# Altium PCB DrumPad.PcbDoc
Units mm, origin at the board's own origin, x right, y up, seen from the top; angles counter-clockwise.
Board outline 152.4 x 101.6 mm, 2 copper layers (Top Layer, Bottom Layer); 127 components, 61 nets, 559 pads, 0 vias.
Unrouted connection lines stored in the file: 273.
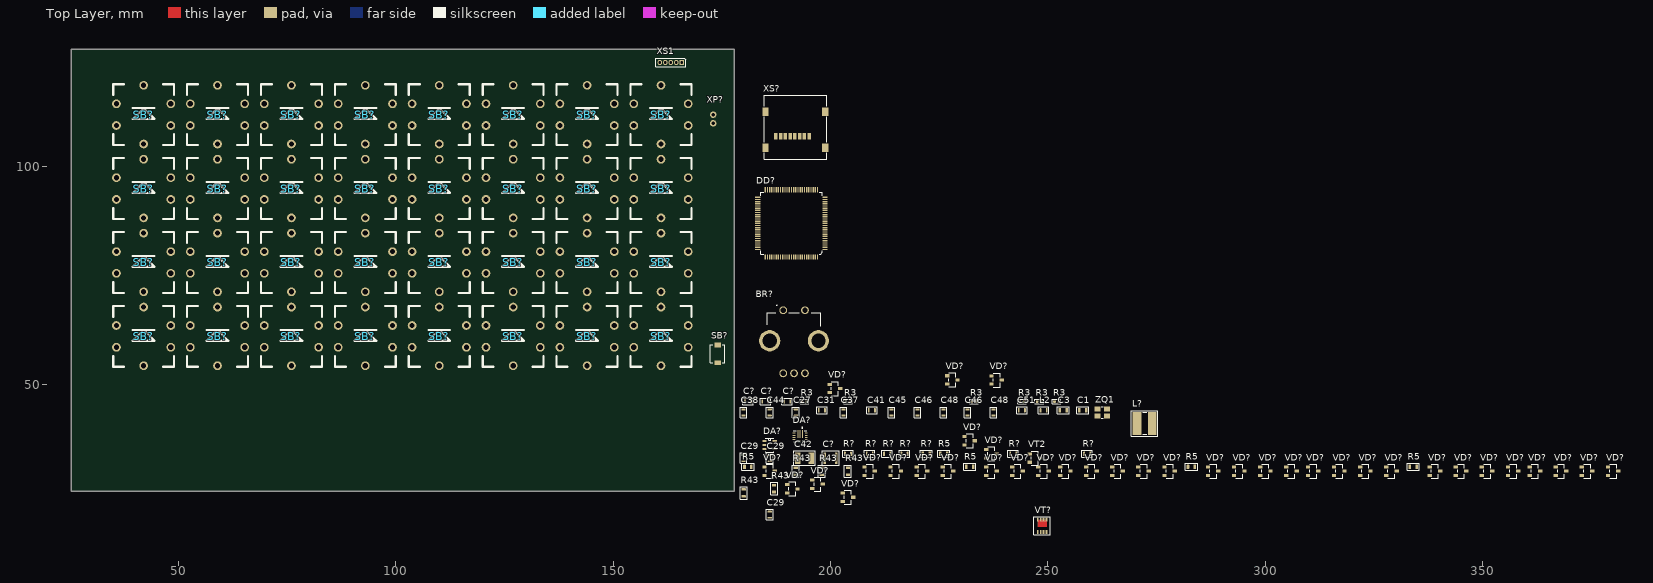
[diagram p0: Top Layer view]
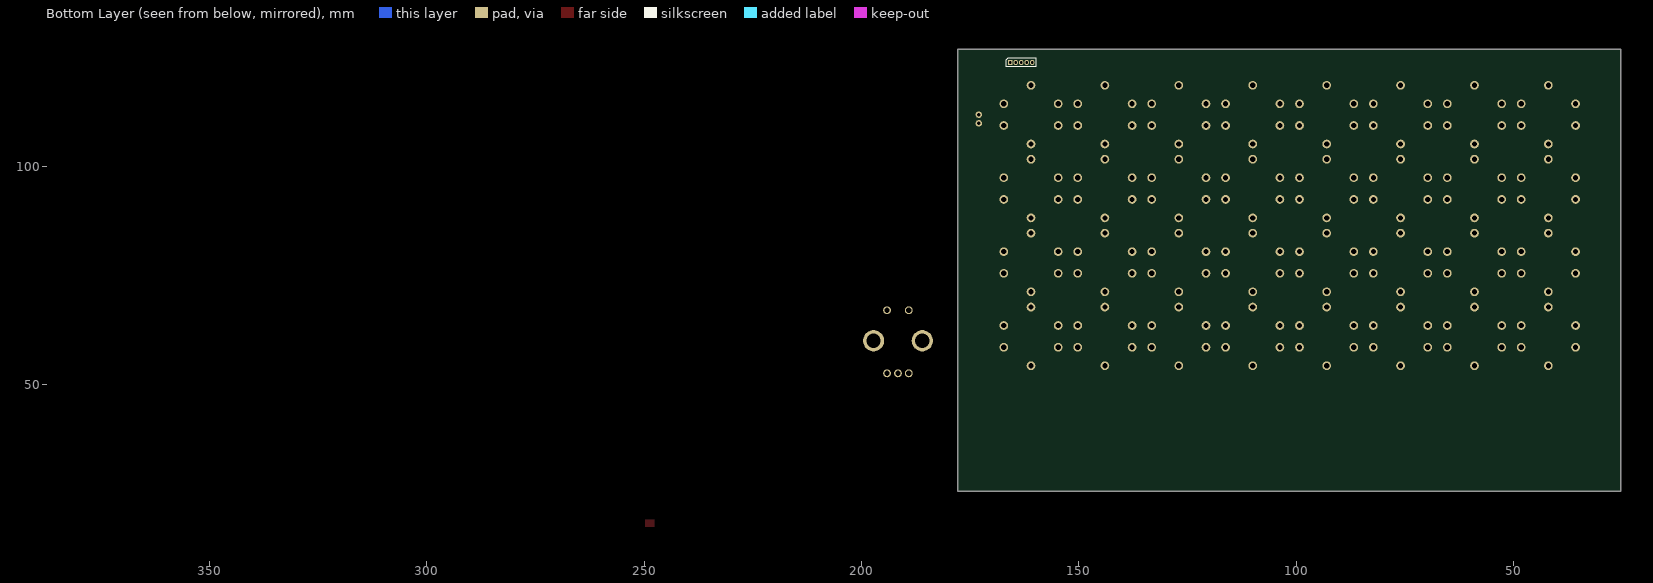
[diagram p1: Bottom Layer view, seen from below]

## Layer stack, top to bottom
Top Solder: solder mask 0.0102, Solder Resist, Dk 3.5
Top Layer: signal copper 0.0356
Dielectric 1: dielectric 0.32, FR-4, Dk 4.8
Bottom Layer: signal copper 0.0356
Bottom Solder: solder mask 0.0102, Solder Resist, Dk 3.5

## Board outline
25.4,25.4 177.8,25.4 177.8,127 25.4,127

## Design rules (kind name [scope] priority, off if disabled: settings)
Clearance [All] p1: gap=0.254 ignorepadtopadclearanceinfootprint=FALSE except(0: Arc-Hole Track-Hole SMDPad-Hole THPad-Hole Via-Hole Fill-Hole Poly-Hole Region-Hole Text-Hole)
PolygonConnect [All] p1: connectstyle=Relief reliefconductorwidth=0.254 reliefentries=4 polygonreliefangle="90 Angle" airgapwidth=0.254
RoutingVias [All] p1: holewidth=0.711 width=1.27 viastyle="Through Hole" minholewidth=0.711 minwidth=1.27 maxholewidth=0.711 maxwidth=1.27
SolderMaskExpansion [All] p1: expansion=0.102 istentingtop=FALSE
Width [All] p1: maxlimit=0.254 minlimit=0.254 preferedwidth=0.254
30 further rules are at their usual default settings.

## Classes and differential pairs
component class DrumPad: BR? C1 C3 C27 C29 C31 C37 C38 C41 C42 C44 C45 C46 C48 C51 C? DA? DD? L2 L? R3 R5 R43 R? SB? VD? VT2 VT? XP? XS1 XS? ZQ1

## Components (designator, comment, footprint, x,y, rotation, side; value= is the part's Value field where it differs from the comment)
BR? "PEC12R-4220F-S0024" PEC12R4220FS0024 189.1,67 r0 top
C1 "GRM1885C1H100JA01" C_0603_Manual_mount 257.999,44 r0 top value=10
C3 "GRM1885C1H100JA01" C_0603_Manual_mount 253.499,44 r0 top value=10
C27 "CC0603KRX7R9BB104" C_0603_Auto_mount 192,43.5 r90 top value="0,1 мк"
C29 "CC0603KRX7R9BB104" C_0603_Auto_mount 186,33 r90 top value="0,1 мк"
C29 "CC0603KRX7R9BB104" C_0603_Auto_mount 180,33 r90 top value="0,1 мк"
C29 "CC0603KRX7R9BB104" C_0603_Auto_mount 186,20 r90 top value="0,1 мк"
C31 "GRM188R61C105KA93" C_0603_Auto_mount 198,44 r0 top value="1,0 мк"
C37 "CC0603KRX7R9BB104" C_0603_Auto_mount 203,43.5 r90 top value="0,1 мк"
C38 "GRM188R61E225KA12" C_0603_Auto_mount 180,43.5 r90 top value="2,2 мк"
C41 "CC0603KRX7R9BB104" C_0603_Auto_mount 209.5,44 r0 top value="0,1 мк"
C42 "GRM32ER61H106MA12" C_1210_Manual_mount 194,33 r0 top value="10 мк"
C44 "GRM188R61E225KA12" C_0603_Auto_mount 186,43.5 r90 top value="2,2 мк"
C45 "CC0603KRX7R9BB104" C_0603_Auto_mount 214,43.5 r90 top value="0,1 мк"
C46 "CC0603KRX7R9BB104" C_0603_Auto_mount 220,43.5 r90 top value="0,1 мк"
C46 "CC0603KRX7R9BB104" C_0603_Auto_mount 231.5,43.5 r90 top value="0,1 мк"
C48 "CC0603KRX7R9BB104" C_0603_Auto_mount 237.5,43.5 r90 top value="0,1 мк"
C48 "CC0603KRX7R9BB104" C_0603_Auto_mount 226,43.5 r90 top value="0,1 мк"
C51 "CC0603KRX5R5BB475" C_0603_Auto_mount 244,44 r0 top value="4,7 мк"
C? "CC0603KRX7R8BB103" C_0603_Auto_mount 185,46 r0 top value="0,01 мк"
C? "CC0603KRX7R8BB103" C_0603_Auto_mount 181,46 r0 top value="0,01 мк"
C? "CC0603KRX7R8BB103" C_0603_Auto_mount 190,46 r0 top value="0,01 мк"
C? "CC1210KRX5R5BB476" C_1210_Auto_mount 200,33 r0 top value="47 мк"
DA? "TPS630250" VQFN-14 193,38 r270 top
DA? "MAX1555EZK" SOT-23-5 186,36 r0 top
DD? "STM32F407VET6" LQFP-100 191,87 r180 top
L2 "BLM18AG102SN1" FB_0603_Auto_mount 249,44 r0 top value="1000 Ом (100 МГц)"
L? "SPM4020T-1R0M-LR" SRR4028 272.25,41 r0 top value="1 мкГн"
R3 "RC0402JR-0710KL" R_0402_Manual_mount 233,46 r0 top value="10 к"
R3 "RC0402JR-0710KL" R_0402_Manual_mount 194,46 r0 top value="10 к"
R3 "RC0402JR-0710KL" R_0402_Manual_mount 204,46 r0 top value="10 к"
R3 "RC0402JR-0710KL" R_0402_Manual_mount 248,46 r0 top value="10 к"
R3 "RC0402JR-0710KL" R_0402_Manual_mount 252,46 r0 top value="10 к"
R3 "RC0402JR-0710KL" R_0402_Manual_mount 244,46 r0 top value="10 к"
R5 "RC0603JR-07330RL" R_0603_Manual_mount 334,31 r0 top value=330
R5 "RC0603JR-07330RL" R_0603_Manual_mount 181,31 r0 top value=330
R5 "RC0603JR-07330RL" R_0603_Manual_mount 283,31 r0 top value=330
R5 "RC0603JR-07330RL" R_0603_Manual_mount 232,31 r0 top value=330
R5 "RC0603JR-07330RL" R_0603_Manual_mount 226,34 r0 top value=330
R43 "RC0603FR-074K7L" R_0603_Manual_mount 192,30 r90 top value="4,7 к"
R43 "RC0603FR-074K7L" R_0603_Manual_mount 204,30 r90 top value="4,7 к"
R43 "RC0603FR-074K7L" R_0603_Manual_mount 180,25 r90 top value="4,7 к"
R43 "RC0603FR-074K7L" R_0603_Manual_mount 187,26 r90 top value="4,7 к"
R43 "RC0603FR-074K7L" R_0603_Manual_mount 198,30 r90 top value="4,7 к"
R? "RC0603FR-07180KL" R_0603_Auto_mount 213,34 r0 top value="180 к"
R? "RC0603JR-07560KL" R_0603_Auto_mount 242,34 r0 top value="560 к"
R? "RC0603JR-07100KL" R_0603_Auto_mount 259,34 r0 top value="100 к"
R? "RC0603JR-0710KL" R_0603_Manual_mount 222,34 r0 top value="10 к"
R? "RC0603JR-07100KL" R_0603_Auto_mount 209,34 r0 top value="100 к"
R? "RC0603JR-07100KL" R_0603_Auto_mount 204,34 r0 top value="100 к"
R? "RC0603JR-07100KL" R_0603_Auto_mount 217,34 r0 top value="100 к"
SB? "TL1015AF160QG" TL1015AF160QG 174,57 r90 top
SB? "Led_button" Led_button 76,112 r0 top
SB? "Led_button" Led_button 110,78 r0 top
SB? "Led_button" Led_button 161,78 r0 top
SB? "Led_button" Led_button 110,95 r0 top
SB? "Led_button" Led_button 42,95 r0 top
SB? "Led_button" Led_button 93,78 r0 top
SB? "Led_button" Led_button 76,61 r0 top
SB? "Led_button" Led_button 127,112 r0 top
SB? "Led_button" Led_button 76,78 r0 top
SB? "Led_button" Led_button 59,61 r0 top
SB? "Led_button" Led_button 127,78 r0 top
SB? "Led_button" Led_button 127,95 r0 top
SB? "Led_button" Led_button 144,78 r0 top
SB? "Led_button" Led_button 127,61 r0 top
SB? "Led_button" Led_button 59,95 r0 top
SB? "Led_button" Led_button 59,112 r0 top
SB? "Led_button" Led_button 59,78 r0 top
SB? "Led_button" Led_button 110,112 r0 top
SB? "Led_button" Led_button 161,95 r0 top
SB? "Led_button" Led_button 93,61 r0 top
SB? "Led_button" Led_button 42,112 r0 top
SB? "Led_button" Led_button 161,112 r0 top
SB? "Led_button" Led_button 144,95 r0 top
SB? "Led_button" Led_button 144,112 r0 top
SB? "Led_button" Led_button 93,112 r0 top
SB? "Led_button" Led_button 42,78 r0 top
SB? "Led_button" Led_button 76,95 r0 top
SB? "Led_button" Led_button 161,61 r0 top
SB? "Led_button" Led_button 93,95 r0 top
SB? "Led_button" Led_button 42,61 r0 top
SB? "Led_button" Led_button 144,61 r0 top
SB? "Led_button" Led_button 110,61 r0 top
VD? "BAT54" SOT-23 317,30 r0 top
VD? "BAT54" SOT-23 357,30 r0 top
VD? "BAT54" SOT-23 288,30 r0 top
VD? "BAT54" SOT-23 237,30 r0 top
VD? "BAT54" SOT-23 374,30 r0 top
VD? "BAT54" SOT-23 266,30 r0 top
VD? "BAT54" SOT-23 209,30 r0 top
VD? "BAT54" SOT-23 294,30 r0 top
VD? "BAT54" SOT-23 362,30 r0 top
VD? "BAT54" SOT-23 254,30 r0 top
VD? "BAT54" SOT-23 221,30 r0 top
VD? "BAT54" SOT-23 243,30 r0 top
VD? "BAT54" SOT-23 272,30 r0 top
VD? "BAT54" SOT-23 339,30 r0 top
VD? "BAT54" SOT-23 368,30 r0 top
VD? "BAT54" SOT-23 351,30 r0 top
VD? "BAT54" SOT-23 345,30 r0 top
VD? "BAT54" SOT-23 227,30 r0 top
VD? "BAT54" SOT-23 215,30 r0 top
VD? "BAT54" SOT-23 249,30 r0 top
VD? "BAT54" SOT-23 278,30 r0 top
VD? "BAT54" SOT-23 329,30 r0 top
VD? "BAT54" SOT-23 260,30 r0 top
VD? "BAT54" SOT-23 191.2,25.95 r0 top
VD? "BAT54" SOT-23 311,30 r0 top
VD? "BAT54" SOT-23 204,24 r0 top
VD? "BAT54" SOT-23 380,30 r0 top
VD? "BAT54" SOT-23 323,30 r0 top
VD? "BAT54" SOT-23 197,27 r0 top
VD? "BAT54" SOT-23 186,30 r0 top
VD? "BAT54" SOT-23 300,30 r0 top
VD? "BAT54" SOT-23 306,30 r0 top
VD? "BAT54" SOT-23 201,49 r0 top
VD? "BAT54" SOT-23 238.2,50.95 r0 top
VD? "BAT54" SOT-23 228,51 r0 top
VD? "BAT54" SOT-23 232,37 r0 top
VD? "BAT54" SOT-23 237,34 r0 top
VT2 "BC817-40" SOT-23 247,33 r0 top
VT? "Si7415DN" PowerPAK-1212-8 248.67,17.435 r90 top
XP? "B2B-PH-K-S" B2B-PH-K-S 173,111 r270 top
XS1 "PBS1.27-5" PBS1.27-5 163.27,124 r180 top
XS? "5009010801" "MOLEX 5009010801" 195.1,107 r180 top
ZQ1 "NX3225SA-16.000M-STD-CRS-2" NX3225SA 262.499,43.5 r0 top value="16 МГц"

## Footprints (in the part's own frame and the unit in brackets; to place one, negate y for a bottom-side part, rotate by r counter-clockwise, add the part's x,y. Pads: shape width x height; smd on the part's side, far side on the other; paste and mask are expansions set on the pad)
B2B-PH-K-S [mm] "PH connector"
  round 1.5 hole 0.8 unplated: 1(1,0) 2(-1,0)
  body extent -2.95,-1.7 2.95,2.8, height 6.2
C_0603_Auto_mount [mm] "SMD 0603"
  rrect35% 0.4x0.95 smd: 1(-0.7,0) 2(0.7,0)
  silkscreen extent -1.2,-0.77 1.2,0.77, body extent -0.8,-0.43 0.8,0.43, height 0.9
C_0603_Manual_mount [mm] "SMD 0603"
  rrect35% 0.6x1 smd: 1(-0.8,0) 2(0.8,0)
  silkscreen extent -1.4,-0.8 1.4,0.8, body extent -0.8,-0.43 0.8,0.43, height 0.9
C_1210_Auto_mount [mm] "SMD 1210"
  rrect20% 0.6x2.7 smd: 1(-1.35,0) 2(1.35,0)
  silkscreen extent -1.95,-1.65 1.95,1.65, body extent -1.55,-1.3 1.55,1.3, height 2.5
C_1210_Manual_mount [mm] "SMD 1210"
  rrect20% 1.2x2.7 smd: 1(-1.55,0) 2(1.55,0)
  silkscreen extent -2.45,-1.65 2.45,1.65, body extent -1.55,-1.3 1.55,1.3, height 2.5
FB_0603_Auto_mount [mm] "SMD 0603"
  rrect35% 0.4x0.95 smd: 1(-0.7,0) 2(0.7,0)
  silkscreen extent -1.2,-0.77 1.2,0.77, body extent -0.8,-0.43 0.8,0.43, height 0.9
Led_button [mm] "Кнопка с встроеным светодиодом"
  round 2 hole 1.2: 1(-6.25,-2.5) 1(6.25,-2.5) 2(-6.25,2.5) 2(6.25,2.5) 3(0,-6.75) 4(0,6.75)
  silkscreen extent -7,-7 7,7, body extent -6.66,-8 6.66,8, height 7.1
LQFP-100 [mm] "14 x 14 mm 100 pin low-profile quad flat package outline"
  oval 1.2x0.3 smd paste-0.025 mask+0.05: 1(-7.75,6)
  rect 1.2x0.3 smd paste-0.025 mask+0.05: 2(-7.75,5.5) 3(-7.75,5) 4(-7.75,4.5) 5(-7.75,4) 6(-7.75,3.5) 7(-7.75,3) 8(-7.75,2.5) 9(-7.75,2) 10(-7.75,1.5) 11(-7.75,1) 12(-7.75,0.5) 13(-7.75,0) 14(-7.75,-0.5) 15(-7.75,-1) 16(-7.75,-1.5) 17(-7.75,-2) 18(-7.75,-2.5) 19(-7.75,-3) 20(-7.75,-3.5) 21(-7.75,-4) 22(-7.75,-4.5) 23(-7.75,-5) 24(-7.75,-5.5) 25(-7.75,-6) 51(7.75,-6) 52(7.75,-5.5) 53(7.75,-5) 54(7.75,-4.5) 55(7.75,-4) 56(7.75,-3.5) 57(7.75,-3) 58(7.75,-2.5) 59(7.75,-2) 60(7.75,-1.5) 61(7.75,-1) 62(7.75,-0.5) 63(7.75,0) 64(7.75,0.5) 65(7.75,1) 66(7.75,1.5) 67(7.75,2) 68(7.75,2.5) 69(7.75,3) 70(7.75,3.5) 71(7.75,4) 72(7.75,4.5) 73(7.75,5) 74(7.75,5.5) 75(7.75,6)
  rect 0.3x1.2 smd paste-0.025 mask+0.05: 26(-6,-7.75) 27(-5.5,-7.75) 28(-5,-7.75) 29(-4.5,-7.75) 30(-4,-7.75) 31(-3.5,-7.75) 32(-3,-7.75) 33(-2.5,-7.75) 34(-2,-7.75) 35(-1.5,-7.75) 36(-1,-7.75) 37(-0.5,-7.75) 38(0,-7.75) 39(0.5,-7.75) 40(1,-7.75) 41(1.5,-7.75) 42(2,-7.75) 43(2.5,-7.75) 44(3,-7.75) 45(3.5,-7.75) 46(4,-7.75) 47(4.5,-7.75) 48(5,-7.75) 49(5.5,-7.75) 50(6,-7.75) 76(6,7.75) 77(5.5,7.75) 78(5,7.75) 79(4.5,7.75) 80(4,7.75) 81(3.5,7.75) 82(3,7.75) 83(2.5,7.75) 84(2,7.75) 85(1.5,7.75) 86(1,7.75) 87(0.5,7.75) 88(0,7.75) 89(-0.5,7.75) 90(-1,7.75) 91(-1.5,7.75) 92(-2,7.75) 93(-2.5,7.75) 94(-3,7.75) 95(-3.5,7.75) 96(-4,7.75) 97(-4.5,7.75) 98(-5,7.75) 99(-5.5,7.75) 100(-6,7.75)
  silkscreen extent -7.1,-7.1 7.1,7.1, body extent -8,-8 8,8, height 1.5
"MOLEX 5009010801" [mm] "Molex microSD connector"
  rect 1.45x2 smd: 0(-3.675,2.6) 0(-3.675,-5.7) 0(10.075,-5.7) 0(10.075,2.6)
  rect 0.8x1.5 smd: 1(0,0) 2(1.1,0) 3(2.2,0) 4(3.3,0) 5(4.4,0) 6(5.5,0) 7(6.6,0) 8(7.7,0)
  silkscreen extent -4,-9.45 10.4,5.25, body extent -4.1,-9.35 10.5,5.15, height 1.93
NX3225SA [mm]
  rrect20% 1.4x1.2 smd: 1(-1.1,-0.8) 2(1.1,-0.8) 3(1.1,0.8) 4(-1.1,0.8)
  silkscreen extent -0.2,-1.35 0.2,1.35, body extent -1.6,-1.25 1.61,1.26, height 0.55
PBS1.27-5 [mm] "1.27mm-step 5-pin connector"
  rect 1x1.2 hole 0.6: 1(-2.54,0)
  oval 1x1.2 hole 0.6: 2(-1.27,0) 3(0,0) 4(1.27,0) 5(2.54,0)
  silkscreen extent -3.45,-1 3.45,1, body extent -3.33,-0.9 3.34,0.9, height 4.4
PEC12R4220FS0024 [mm]
  round 1.8 hole 1.2: 1(0,0) 2(5,0) A1(0,-14.5) B1(5,-14.5) C1(2.5,-14.5)
  round 4.875 hole 3.25: MH1(8.1,-7) MH2(-3.1,-7)
  silkscreen extent -3.7,-3.65 8.7,1.2, body extent -4.5,-14.6 9.5,0.15, height 20
PowerPAK-1212-8 [mm]
  rect 0.99x0.405 smd: D(1.435,-0.99) D(1.435,-0.33) D(1.435,0.33) D(1.435,0.99) G(-1.435,-0.99) S(-1.435,-0.33) S(-1.435,0.33) S(-1.435,0.99)
  Top Layer region: -0.325,-1.118 1.4,-1.118 1.4,1.117 -0.325,1.117
  silkscreen extent -2.11,-1.9 2.12,1.9, body extent -1.63,-1.8 1.63,1.8, height 1.12
R_0402_Manual_mount [mm] "SMD 0402"
  rrect50% 0.6x0.6 smd: 1(-0.5,0) 2(0.5,0)
  silkscreen extent -1,-0.5 1,0.5, body extent -0.5,-0.25 0.5,0.25, height 0.35
R_0603_Auto_mount [mm] "SMD 0603"
  rrect35% 0.4x0.95 smd: 1(-0.7,0) 2(0.7,0)
  silkscreen extent -1.2,-0.77 1.2,0.77, body extent -0.8,-0.43 0.8,0.43, height 0.45
R_0603_Manual_mount [mm] "SMD 0603"
  rrect35% 0.6x1 smd: 1(-0.8,0) 2(0.8,0)
  silkscreen extent -1.4,-0.8 1.4,0.8, body extent -0.8,-0.43 0.8,0.43, height 0.45
SOT-23 [mm] "SOT-23"
  rect 1x0.7 smd paste-0.05: 1(-1.2,0.95) 2(-1.2,-0.95) 3(1.2,0)
  silkscreen extent -0.8,-1.6 0.8,1.6, body extent -1.25,-1.5 1.25,1.5, height 1
SOT-23-5 [mm] "SOT-23"
  oval 1x0.45 smd: 1(-1.2,0.95)
  rect 1x0.45 smd: 2(-1.2,0) 3(-1.2,-0.95) 4(1.2,-0.95) 5(1.2,0.95)
  silkscreen extent -0.9,-1.6 0.9,1.6, body extent -1.4,-1.5 1.4,1.5, height 1.35
SRR4028 [mm] "Bourns shielded power inductor"
  rect 2x5.3 smd paste-1.5: 1(-1.75,0) 2(1.75,0)
  silkscreen extent -3.05,-2.95 3.05,2.95, body extent -2.4,-2.4 2.4,2.4, height 2.8
TL1015AF160QG [mm] "SMD button"
  rect 1.05x1.5 smd: 1(-2.025,0) 2(2.025,0)
  silkscreen extent -2.1,-1.65 2.1,1.65, body extent -2.23,-1.55 2.23,1.55, height 2
VQFN-14 [mm]
  rect 1.79x0.22 smd paste-2 mask+0: 1(-0.555,0.49) 3(-0.555,-0.49)
  rect 1.79x0.24 smd paste-2 mask+0: 2(-0.555,0)
  rect 0.24x0.6 smd mask+0: 4(-0.75,-1.4) 5(-0.25,-1.4) 6(0.25,-1.4) 7(0.75,-1.4) 11(0.75,1.4) 12(0.25,1.4) 13(-0.25,1.4) 14(-0.75,1.4)
  rect 0.6x0.24 smd mask+0: 8(1.15,-0.5) 9(1.15,0) 10(1.15,0.5)
  silkscreen extent -2.1,-1.5 1.25,1.5, body extent -1.25,-1.5 1.25,1.5, height 0.95

## Part data
BR?: "Encoder", Manufacturer="/Укажите компанию-производителя/", Num of detends=24, Num of pulses=24, Type="Энкодер инкрементальный"
C1 C3: "Chip Monolithic Ceramic Capacitor", Manufacturer="Murata Manufacturing", Rated voltage="50 В", Temperature coefficient="±30 ppm/°C", Temperature range="-55 ... 125 °C", Tolerance=0,05, Size=0603, TC=C0G, Type="Конденсатор керамический"
C27 C29 C29 C29 C37 C41 C45 C46 C46 C48 C48: "Surface-mount Ceramic Multilayer Capacitor", Manufacturer=YAGEO, Rated voltage="50 В", Temperature coefficient="±15 %", Temperature range="-55 ... 125 °C", Tolerance="10 %", Size=0603, TC=X7R, Type="Конденсатор керамический"
C31: "Chip Monolithic Ceramic Capacitor", Manufacturer="Murata Manufacturing", Rated voltage="16 В", Temperature coefficient="±15 %", Temperature range="-55 ... 85 °C", Tolerance=0,1, Size=0603, TC=X5R, Type="Конденсатор керамический"
C38 C44: "Chip Monolithic Ceramic Capacitor", Manufacturer="Murata Manufacturing", Rated voltage="25 В", Temperature coefficient="±15 %", Temperature range="-55 ... 85 °C", Tolerance=0,1, Size=0603, TC=X5R, Type="Конденсатор керамический"
C42: "Chip Monolithic Ceramic Capacitor", Manufacturer="Murata Manufacturing", Rated voltage="50 В", Temperature coefficient="±15 %", Temperature range="-55 ... 85 °C", Tolerance=0,2, Size=1210, TC=X5R, Type="Конденсатор керамический"
C51 C?: "Surface-mount Ceramic Multilayer Capacitor", Manufacturer=YAGEO, Rated voltage="6,3 В", Temperature coefficient="±15 %", Temperature range="-55 ... 85 °C", Tolerance="10 %", TC=X5R, Type="Конденсатор керамический"
  C51: Size=0603
  C?: Size=1210
C? C? C?: "Surface-mount Ceramic Multilayer Capacitor", Manufacturer=YAGEO, Rated voltage="25 В", Temperature coefficient="±15 %", Temperature range="-55 ... 125 °C", Tolerance="10 %", Size=0603, TC=X7R, Type="Конденсатор керамический"
DA?: "High efficiency, low quiescent current buck-boost converter", Input voltage="2,3 ... 5,5 В", Manufacturer=TI, Output voltage="3,3 В", Temperature range="-40 ... 85°C", Type="Импульсный преобразователь напряжения с гальванической развязкой"
DA?: "1S Li-Po/Li-Ion charger", Input voltage="3,7 ... 7 В", Manufacturer="maxim integrated", Output Current=DC280/USB90, Temperature range="-40 ... 85 °C", Battery type=Li-Ion/Li-Poly, Number of cells=1, Type="Контроллер АКБ"
DD?: "ARM Cortex-M4 32b MCU+FPU, 210DMIPS, up to 1MB Flash/192+4KB RAM,  crypto, USB OTG HS/FS, Ethernet, 17 TIMs, 3 ADCs, 15 comm. interfaces & camera", CPU frequency="168 МГц", Manufacturer=STMicroelectronics, Supply voltage="1,8 ... 3,6 В", Temperature range="-40 ... 85 °C", ADC=3, ADC channels=16, ADC resolution="12 бит", Camera interface=Нет, CAN=2, Cryptography=Есть, DAC=2, DAC resolution="12 бит", DMA=Есть, DSP=Есть, Ethernet=Нет, Flash="1024 кбайт", FPU=Есть, FSMC=Есть, I2C=3, MPU=Есть, Processor architecture="ARM Cortex-M4", Random number generator=Есть, RTC=Есть, SDIO=Есть, SPI/I2S=3/2, SRAM="192+4 кбайт", Timers=10+2+2, Type=Микроконтроллер, USART/UART=4/2, USB OTG FS=Есть, USB OTG HS=Есть
L2: "Chip Ferrite Bead", DC resistance="500 мОм", Manufacturer="Murata Manufacturing", Rated current="400 мА", Temperature range="-55 ... 125 °C", Tolerance=25%, Size=0603, Type="Ферритовая бусина"
L?: "Shielded Power Inductor", DC resistance=28мОм, Manufacturer=TDK, Rated current="9 А", Saturation current="5.6 А", Temperature range="-40 ... 125°C", Test frequency=100КГц, Tolerance=20%, Size="4.4x4.1x2.0 мм", Type="Индуктивность силовая"
R3 R3 R3 R3 R3 R3: "General Purpose Chip Resistor", Manufacturer=YAGEO, Power dissitipation="0,0625 Вт", Temperature coefficient="±100 ppm/°C", Temperature range="-55 ... 155 °C", Tolerance="5 %", Part Number=RC0402JR-0710KL, Size=0402, Type="Резистор постоянный"
R5 R5 R5 R5 R5 R? R? R? R? R? R?: "General Purpose Chip Resistor", Manufacturer=YAGEO, Power dissitipation="0,1 Вт", Temperature coefficient="±100 ppm/°C", Temperature range="-55 ... 155 °C", Tolerance="5 %", Size=0603, Type="Резистор постоянный"
R43 R43 R43 R43 R43: "General Purpose Chip Resistor", Manufacturer=YAGEO, Power dissipation="0,1 Вт", Temperature coefficient="±100 ppm/°C", Temperature range="-55 ... 155 °C", Tolerance="1 %", Part Number=RC0603FR-074K7L, Size=0603, Type="Резистор постоянный"
R?: "General Purpose Chip Resistor", Manufacturer=YAGEO, Power dissitipation="0,1 Вт", Temperature coefficient="±100 ppm/°C", Temperature range="-55 ... 155 °C", Tolerance=1%, Size=0603, Type="Резистор постоянный"
SB?: "SMD pushbutton", Junction resistance="100 мОм", Manufacturer=E-SWITCH, Rated current="50 мА", Rated voltage="12 В", Life cycles=50000, Type="Выключатель кнопочный с самовозвратом"
SB? SB? SB? SB? SB? SB? SB? SB? SB? SB? SB? SB? SB? SB? SB? SB? SB? SB? SB? SB? SB? SB? SB? SB? SB? SB? SB? SB? SB? SB? SB? SB?: "Кнопка с встроенным светодиодом", Junction resistance="100 мОм", Manufacturer=NONAME, Rated current="50 мА", Rated voltage="12 В", Life cycles=100000, Type="Выключатель кнопочный с самовозвратом"
VD? VD? VD? VD? VD? VD? VD? VD? VD? VD? VD? VD? VD? VD? VD? VD? VD? VD? VD? VD? VD? VD? VD? VD? VD? VD? VD? VD? VD? VD? VD? VD? VD? VD? VD? VD? VD?: "Schottky Diode", Forward voltage="0,8 В", Manufacturer="Fairchild Semiconductor", Max forward average current="200 мА", Max forward surge current="600 мА", Max reverse voltage="30 В", Temperature range="-55 ... 150 °C", Specification="ЭКБ ИП", Type="Диод Шоттки"
VT2: "NPN general-purpose transistor", Base-emitter on voltage="1,2 В", Collector-emitter saturation voltage="0,7 В", Manufacturer=NXP, Max collector current="0,5 А", Max collector peak current="1 А", Max collector-base voltage="50 В", Max collector-emitter voltage="45 В", Max emitter-base voltage="5 В", Power dissitipation="0,25 Вт", Temperature range="-65 ... 150 °C", Collector-base сapacitance="3 пФ", Complement=BC807-40, fT="100 МГц", hFE="250 ... 600", Specitication="ЭКБ ИП", Structure=n-p-n, Type="Транзистор биполярный"
VT?: "P-Channel Enhancement Mode Field Effect Transistor", Drain-to-source breakdown voltage="60 В", Gate threshold voltage=3В, Input capacitance="600 пФ", Manufacturer=Vishay, Max continuous drain current=5.7A, Max gate-to-source voltage="20 В", Max pulsed drain current="20 A", Output capacitance=70пФ, Power dissitipation="3.8 Вт", Reverse transfer capacitance="50 пФ", Temperature range="-55 ... 170°C", Rds="0.065 Ом", Structure="Индуцированный канал p-типа", Turn-off time="50 нс", Turn-on time="50 нс", Type="Транзистор полевой с изолированным затвором"
XP?: "PH connector", Manufacturer=JST, Type="Вилка на плату"
XS1: library part "SWD PBS1.27-5", "PBS connector", Manufacturer=NONAME, Connector type="Розетка на плату", Interface=SWD, Number of contacts=5, Type="Разъем штыревой"
XS?: "1.10mm Pitch TransFlash Memory Card Connector, Hinge Type, Round Corner Top", Manufacturer=Molex, Connector type="Разъем MicroSD на плату", Number of contacts=11, Type=Разъем
ZQ1: "QUARTZ CRYSTAL", Frequency stability="±15 ppm", Load capacitance="8 пФ", Manufacturer=NDK, Temperature range="-40 ... 125 °C", Type="Кварцевый резонатор"

## Nets (pads, with @x,y where several pads share a name; then routed paths per layer and width w, separated by ;. In a path a pad name is that pad's centre, name@x,y a point inside that pad or via, vN(x,y) a via of type N, cw(c..) or ccw(c..) an arc to the next point about the centre after c; other vN are vias at no path point)
3V3: C29.1@186,19.3 R43.2 XS1.2 XS?.4
B_C1: SB?.2@35.75,63.5 SB?.2@35.75,80.5 SB?.2@35.75,97.5 SB?.2@35.75,114.5 SB?.2@48.25,63.5 SB?.2@48.25,80.5 SB?.2@48.25,97.5 SB?.2@48.25,114.5
B_C2: SB?.2@52.75,63.5 SB?.2@52.75,80.5 SB?.2@52.75,97.5 SB?.2@52.75,114.5 SB?.2@65.25,63.5 SB?.2@65.25,80.5 SB?.2@65.25,97.5 SB?.2@65.25,114.5
B_C3: SB?.2@69.75,63.5 SB?.2@69.75,80.5 SB?.2@69.75,97.5 SB?.2@69.75,114.5 SB?.2@82.25,63.5 SB?.2@82.25,80.5 SB?.2@82.25,97.5 SB?.2@82.25,114.5
B_C4: SB?.2@86.75,63.5 SB?.2@86.75,80.5 SB?.2@86.75,97.5 SB?.2@86.75,114.5 SB?.2@99.25,63.5 SB?.2@99.25,80.5 SB?.2@99.25,97.5 SB?.2@99.25,114.5
B_C5: SB?.2@103.75,63.5 SB?.2@103.75,80.5 SB?.2@103.75,97.5 SB?.2@103.75,114.5 SB?.2@116.25,63.5 SB?.2@116.25,80.5 SB?.2@116.25,97.5 SB?.2@116.25,114.5
B_C6: SB?.2@120.75,63.5 SB?.2@120.75,80.5 SB?.2@120.75,97.5 SB?.2@120.75,114.5 SB?.2@133.25,63.5 SB?.2@133.25,80.5 SB?.2@133.25,97.5 SB?.2@133.25,114.5
B_C7: SB?.2@137.75,63.5 SB?.2@137.75,80.5 SB?.2@137.75,97.5 SB?.2@137.75,114.5 SB?.2@150.25,63.5 SB?.2@150.25,80.5 SB?.2@150.25,97.5 SB?.2@150.25,114.5
B_C8: SB?.2@154.75,63.5 SB?.2@154.75,80.5 SB?.2@154.75,97.5 SB?.2@154.75,114.5 SB?.2@167.25,63.5 SB?.2@167.25,80.5 SB?.2@167.25,97.5 SB?.2@167.25,114.5
B_R1: VD?.3@340.2,30 VD?.3@346.2,30 VD?.3@352.2,30 VD?.3@358.2,30 VD?.3@363.2,30 VD?.3@369.2,30 VD?.3@375.2,30 VD?.3@381.2,30
B_R2: VD?.3@289.2,30 VD?.3@295.2,30 VD?.3@301.2,30 VD?.3@307.2,30 VD?.3@312.2,30 VD?.3@318.2,30 VD?.3@324.2,30 VD?.3@330.2,30
B_R3: VD?.3@238.2,30 VD?.3@244.2,30 VD?.3@250.2,30 VD?.3@255.2,30 VD?.3@261.2,30 VD?.3@267.2,30 VD?.3@273.2,30 VD?.3@279.2,30
B_R4: VD?.3@187.2,30 VD?.3@192.4,25.95 VD?.3@198.2,27 VD?.3@205.2,24 VD?.3@210.2,30 VD?.3@216.2,30 VD?.3@222.2,30 VD?.3@228.2,30
BAT+: C29.1@186,32.3 DA?.5@187.2,36.95 R?.2@259.7,34 SB?.2@174,59.025 VT?.S XP?.2
BAT_SWITCH+: C42.1 DA?.4@191.6,38.75 DA?.5@191.6,38.25 DA?.6 DA?.7 DA?.8 VT?.D
CHG: R?.2@217.7,34
ENC_A: C?.1@180.3,46 R3.1@232.5,46 VD?.3@239.4,50.95
ENC_B: C?.1@184.3,46 R3.1@203.5,46 VD?.3@229.2,51
ENC_PUSHBUT: C?.1@189.3,46 R3.1@193.5,46 VD?.3@202.2,49
GND: BR?.1 BR?.C1 C1.2 C3.2 C27.2 C29.2 C31.2 C37.2 C38.2 C41.2 C42.2 C44.2 C45.2 C46.2 C48.2 C51.2 C?.2 DA?.2 DA?.9 DA?.10 DD?.10 DD?.20 DD?.27 DD?.74 DD?.94 DD?.99 R?.1@203.3,34 R?.1@208.3,34 R?.1@212.3,34 VT2.2 XP?.1 XS1.3 XS?.0 XS?.6
L_C1: SB?.3@42,54.25 SB?.3@42,71.25 SB?.3@42,88.25 SB?.3@42,105.25
L_C2: SB?.3@59,54.25 SB?.3@59,71.25 SB?.3@59,88.25 SB?.3@59,105.25
L_C3: SB?.3@76,54.25 SB?.3@76,71.25 SB?.3@76,88.25 SB?.3@76,105.25
L_C4: SB?.3@93,54.25 SB?.3@93,71.25 SB?.3@93,88.25 SB?.3@93,105.25
L_C5: SB?.3@110,54.25 SB?.3@110,71.25 SB?.3@110,88.25 SB?.3@110,105.25
L_C6: SB?.3@127,54.25 SB?.3@127,71.25 SB?.3@127,88.25 SB?.3@127,105.25
L_C7: SB?.3@144,54.25 SB?.3@144,71.25 SB?.3@144,88.25 SB?.3@144,105.25
L_C8: SB?.3@161,54.25 SB?.3@161,71.25 SB?.3@161,88.25 SB?.3@161,105.25
L_R1: R5.2@334.8,31 SB?.4@42,101.75 SB?.4@59,101.75 SB?.4@76,101.75 SB?.4@93,101.75 SB?.4@110,101.75 SB?.4@127,101.75 SB?.4@144,101.75 SB?.4@161,101.75
L_R2: R5.2@283.8,31 SB?.4@42,118.75 SB?.4@59,118.75 SB?.4@76,118.75 SB?.4@93,118.75 SB?.4@110,118.75 SB?.4@127,118.75 SB?.4@144,118.75 SB?.4@161,118.75
L_R3: R5.2@232.8,31 SB?.4@42,67.75 SB?.4@59,67.75 SB?.4@76,67.75 SB?.4@93,67.75 SB?.4@110,67.75 SB?.4@127,67.75 SB?.4@144,67.75 SB?.4@161,67.75
L_R4: R5.2@181.8,31 SB?.4@42,84.75 SB?.4@59,84.75 SB?.4@76,84.75 SB?.4@93,84.75 SB?.4@110,84.75 SB?.4@127,84.75 SB?.4@144,84.75 SB?.4@161,84.75
NetBR?_2: BR?.2 R3.2@194.5,46 R3.2@252.5,46 VD?.1@199.8,49.95
NetBR?_A1: BR?.A1 R3.2@233.5,46 R3.2@244.5,46 VD?.1@237,51.9
NetBR?_B1: BR?.B1 R3.2@204.5,46 R3.2@248.5,46 VD?.1@226.8,51.95
NetC27_1: C27.1 C31.1 DD?.22 L2.1
NetC38_1: C38.1 DD?.73
NetC44_1: C44.1 DD?.49
NetDA?_1: DA?.1@193.49,38.555 L?.2
NetDA?_3: DA?.3@192.51,38.555 L?.1
NetDA?_11: DA?.11 R?.1@241.3,34 R?.2@213.7,34
NetDD?_6: DD?.6 DD?.11 DD?.28 DD?.50 DD?.75 DD?.100
NetR5_1: R5.1@225.2,34 R?.2@209.7,34 VD?.3@233.2,37 VT2.1
NetR5_2: R5.2@226.8,34 VD?.3@238.2,34
NetR?_1: R?.1@258.3,34 VT2.3 VT?.G
NetR?_2: R?.2@204.7,34 R?.2@222.8,34 SB?.1@174,54.975
NetSB?_1: SB?.1@103.75,92.5 SB?.1@116.25,92.5 VD?.1@360.8,30.95
nRST: DD?.14 XS1.5
OSC_IN: C3.1 DD?.12 ZQ1.3
OSC_OUT: C1.1 DD?.13 ZQ1.1
PWR_ON: VD?.1@235.8,34.95
SDIO_CLK: XS?.5
SDIO_CMD: R43.1@192,29.2 XS?.3
SDIO_D0: R43.1@198,29.2 XS?.7
SDIO_D1: R43.1@204,29.2 XS?.8
SDIO_D2: R43.1@180,24.2 XS?.1
SDIO_D3: R43.1@187,25.2 XS?.2
SWCLK: DD?.76 XS1.1
SWDIO: DD?.72 XS1.4
VCC3V3: C37.1 C41.1 C45.1 C46.1 C48.1 C51.1 C?.1@198.65,33 DA?.12 DA?.13 DA?.14 DD?.19 L2.2 R3.1@243.5,46 R3.1@247.5,46 R3.1@251.5,46 R?.2@242.7,34
VCC5V: C29.1@180,32.3 DA?.1@184.8,36.95
pads on no net: BR?.MH1 BR?.MH2 DA?.3@184.8,35.05 DA?.4@187.2,35.05 DD?.1 DD?.2 DD?.3 DD?.4 DD?.5 DD?.7 DD?.8 DD?.9 DD?.15 DD?.16 DD?.17 DD?.18 DD?.21 DD?.23 DD?.24 DD?.25 DD?.26 DD?.29 DD?.30 DD?.31 DD?.32 DD?.33 DD?.34 DD?.35 DD?.36 DD?.37 DD?.38 DD?.39 DD?.40 DD?.41 DD?.42 DD?.43 DD?.44 DD?.45 DD?.46 DD?.47 DD?.48 DD?.51 DD?.52 DD?.53 DD?.54 DD?.55 DD?.56 DD?.57 DD?.58 DD?.59 DD?.60 DD?.61 DD?.62 DD?.63 DD?.64 DD?.65 DD?.66 DD?.67 DD?.68 DD?.69 DD?.70 DD?.71 DD?.77 DD?.78 DD?.79 DD?.80 DD?.81 DD?.82 DD?.83 DD?.84 DD?.85 DD?.86 DD?.87 DD?.88 DD?.89 DD?.90 DD?.91 DD?.92 DD?.93 DD?.95 DD?.96 DD?.97 DD?.98 R5.1@180.2,31 R5.1@231.2,31 R5.1@282.2,31 R5.1@333.2,31 R?.1@216.3,34 R?.1@221.2,34 SB?.1@35.75,58.5 SB?.1@35.75,75.5 SB?.1@35.75,92.5 SB?.1@35.75,109.5 SB?.1@48.25,58.5 SB?.1@48.25,75.5 SB?.1@48.25,92.5 SB?.1@48.25,109.5 SB?.1@52.75,58.5 SB?.1@52.75,75.5 SB?.1@52.75,92.5 SB?.1@52.75,109.5 SB?.1@65.25,58.5 SB?.1@65.25,75.5 SB?.1@65.25,92.5 SB?.1@65.25,109.5 SB?.1@69.75,58.5 SB?.1@69.75,75.5 SB?.1@69.75,92.5 SB?.1@69.75,109.5 SB?.1@82.25,58.5 SB?.1@82.25,75.5 SB?.1@82.25,92.5 SB?.1@82.25,109.5 SB?.1@86.75,58.5 SB?.1@86.75,75.5 SB?.1@86.75,92.5 SB?.1@86.75,109.5 SB?.1@99.25,58.5 SB?.1@99.25,75.5 SB?.1@99.25,92.5 SB?.1@99.25,109.5 SB?.1@103.75,58.5 SB?.1@103.75,75.5 SB?.1@103.75,109.5 SB?.1@116.25,58.5 SB?.1@116.25,75.5 SB?.1@116.25,109.5 SB?.1@120.75,58.5 SB?.1@120.75,75.5 SB?.1@120.75,92.5 SB?.1@120.75,109.5 SB?.1@133.25,58.5 SB?.1@133.25,75.5 SB?.1@133.25,92.5 SB?.1@133.25,109.5 SB?.1@137.75,58.5 SB?.1@137.75,75.5 SB?.1@137.75,92.5 SB?.1@137.75,109.5 SB?.1@150.25,58.5 SB?.1@150.25,75.5 SB?.1@150.25,92.5 SB?.1@150.25,109.5 SB?.1@154.75,58.5 SB?.1@154.75,75.5 SB?.1@154.75,92.5 SB?.1@154.75,109.5 SB?.1@167.25,58.5 SB?.1@167.25,75.5 SB?.1@167.25,92.5 SB?.1@167.25,109.5 VD?.1@184.8,30.95 VD?.1@190,26.9 VD?.1@195.8,27.95 VD?.1@202.8,24.95 VD?.1@207.8,30.95 VD?.1@213.8,30.95 VD?.1@219.8,30.95 VD?.1@225.8,30.95 VD?.1@230.8,37.95 VD?.1@235.8,30.95 VD?.1@241.8,30.95 VD?.1@247.8,30.95 VD?.1@252.8,30.95 VD?.1@258.8,30.95 VD?.1@264.8,30.95 VD?.1@270.8,30.95 VD?.1@276.8,30.95 VD?.1@286.8,30.95 VD?.1@292.8,30.95 VD?.1@298.8,30.95 VD?.1@304.8,30.95 VD?.1@309.8,30.95 VD?.1@315.8,30.95 VD?.1@321.8,30.95 VD?.1@327.8,30.95 VD?.1@337.8,30.95 VD?.1@343.8,30.95 VD?.1@349.8,30.95 VD?.1@355.8,30.95 VD?.1@366.8,30.95 VD?.1@372.8,30.95 VD?.1@378.8,30.95 VD?.2 ZQ1.2 ZQ1.4